# EAGLE board nutzen_03 (EAGLE 9.6.2), part 1 of 2
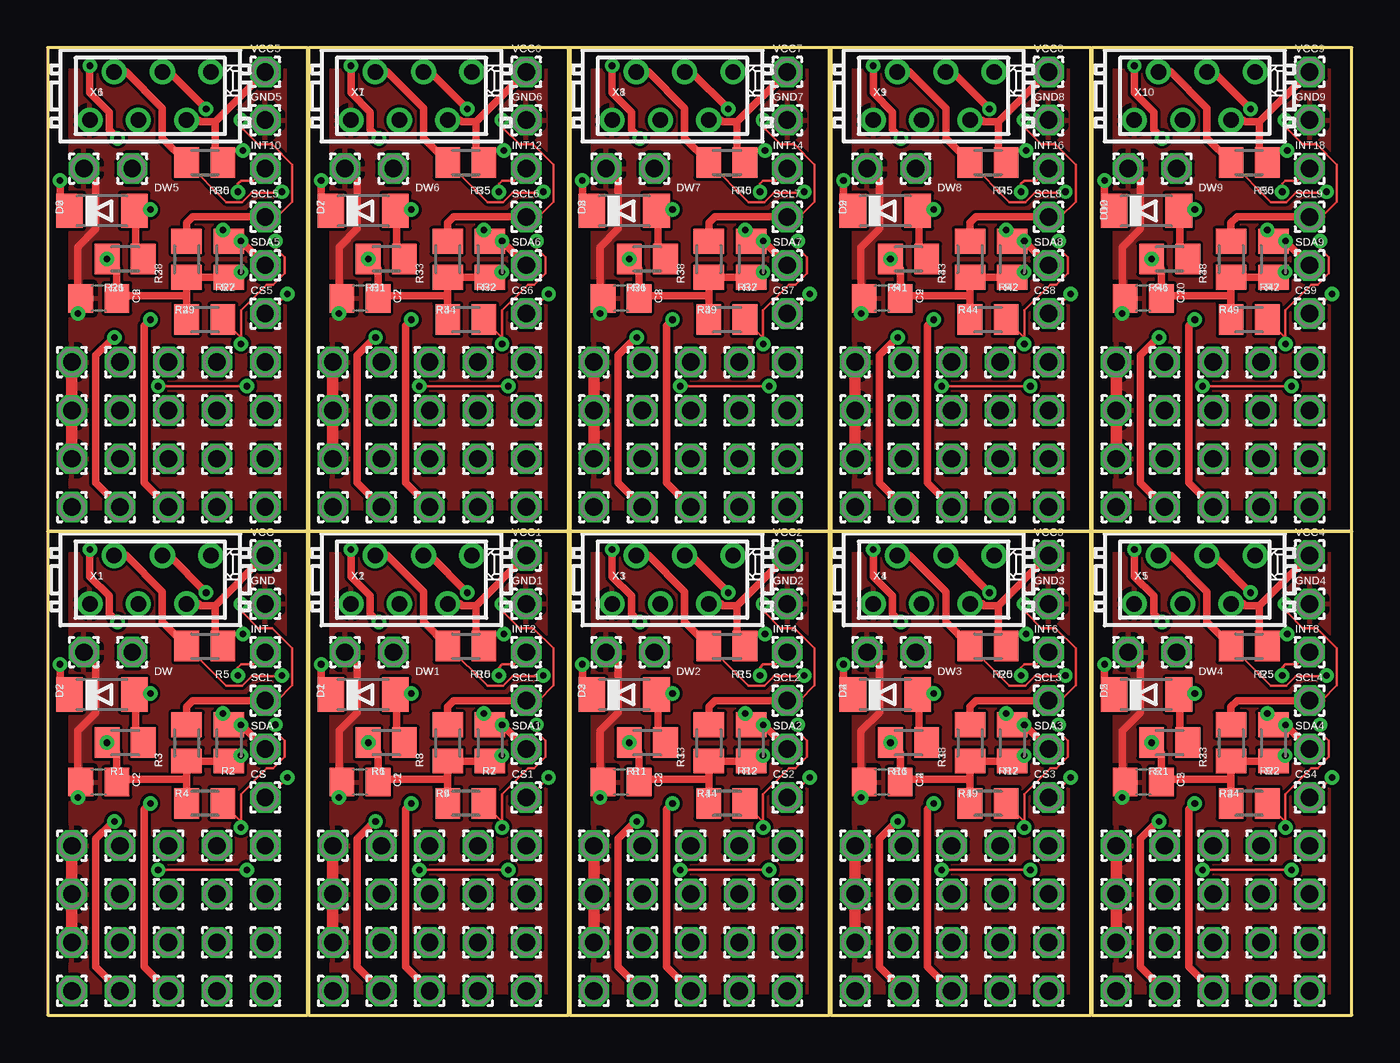
[diagram p0: board, top side]
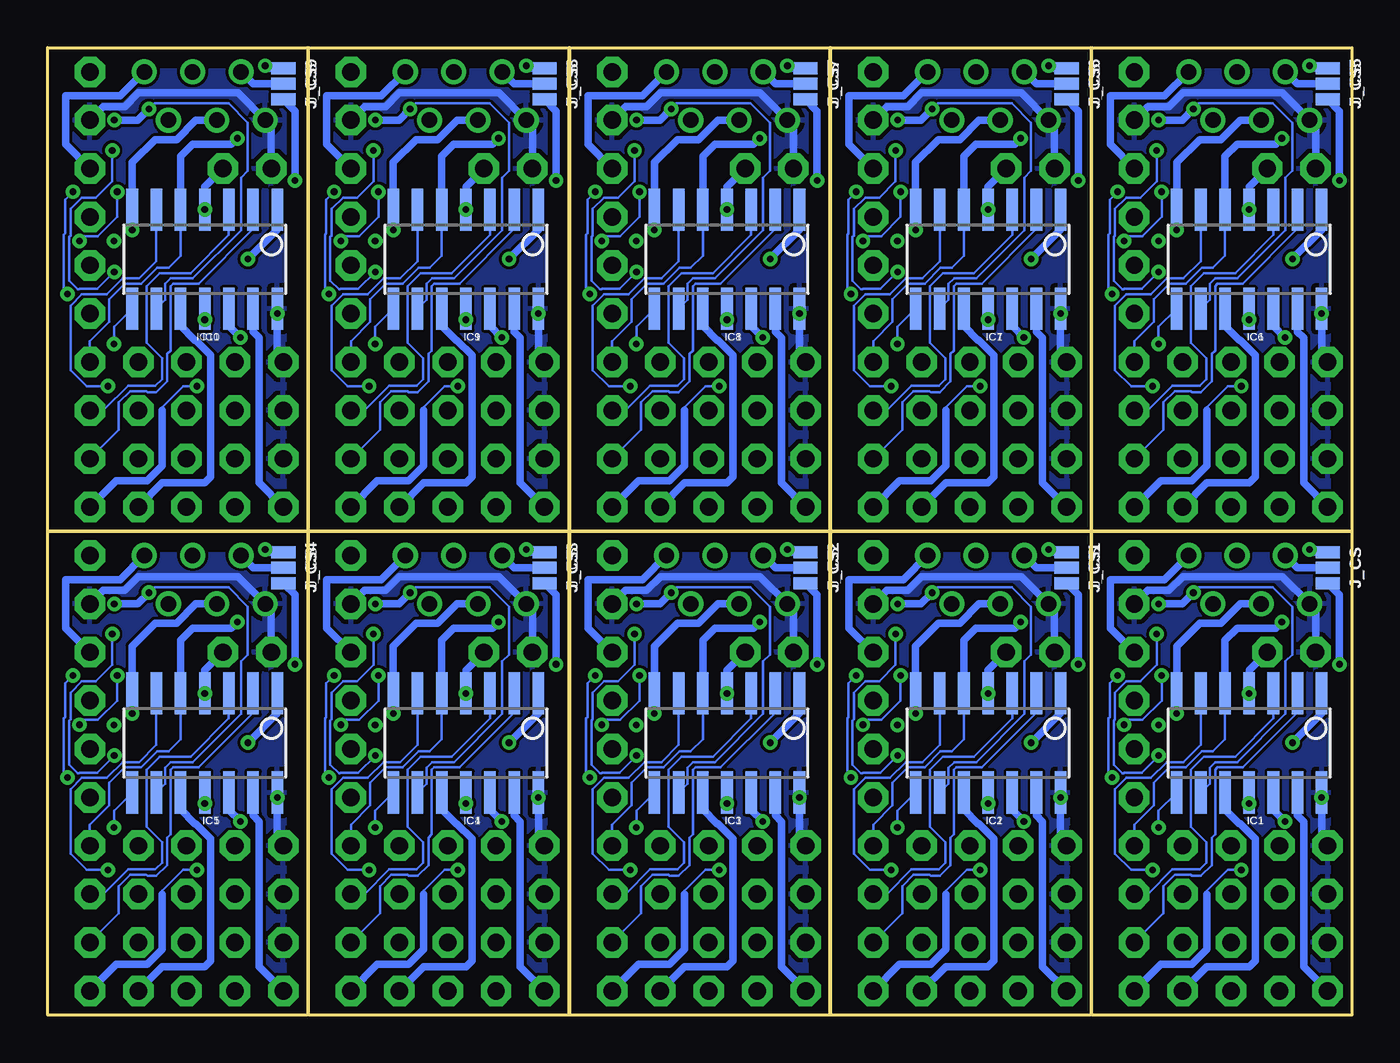
[diagram p1: board, bottom side, seen from below]

Size 68.52 x 50.8 mm. Coordinates in mm from the lower left corner, seen from the top.
Outline: 13.65,25.4 13.65,0 0,0 0,25.4
Outline: 13.65,25.4 0,25.4
Outline: 27.37,25.4 27.37,0 13.72,0 13.72,25.4
Outline: 27.37,25.4 13.72,25.4
Outline: 41.08,25.4 41.08,0 27.43,0 27.43,25.4
Outline: 41.08,25.4 27.43,25.4
Outline: 54.8,25.4 54.8,0 41.15,0 41.15,25.4
Outline: 54.8,25.4 41.15,25.4
Outline: 68.52,25.4 68.52,0 54.86,0 54.86,25.4
Outline: 68.52,25.4 54.86,25.4
Outline: 0,25.4 13.65,25.4
Outline: 13.65,25.4 13.65,50.8 0,50.8 0,25.4
Outline: 13.72,25.4 27.37,25.4
Outline: 27.37,25.4 27.37,50.8 13.72,50.8 13.72,25.4
Outline: 27.43,25.4 41.08,25.4
Outline: 41.08,25.4 41.08,50.8 27.43,50.8 27.43,25.4
Outline: 41.15,25.4 54.8,25.4
Outline: 54.8,25.4 54.8,50.8 41.15,50.8 41.15,25.4
Outline: 54.86,25.4 68.52,25.4
Outline: 68.52,25.4 68.52,50.8 54.86,50.8 54.86,25.4
Copper layers (1*16): Top 0.035mm / dielectric 1.5mm / Bottom 0.035mm
Design rules "default": minimum track width 6mil, minimum drill 0.35mm, track to track 6mil, track to pad 6mil, pad to pad 6mil, via to via 6mil, smd to smd 6mil, copper to edge 40mil, drill to drill 6mil, minimum pad ring 10mil, minimum via ring 8mil, stop-mask expansion 4mil, vias tented up to drill 0mil, thermal gap 10mil

## Footprints (pad centres in the part's own frame; a part is rotated, then mirrored left to right if it is on the bottom)
C0805 = smd 1.3 x 1.5: 1 -0.95,0; 2 0.95,0
1,6/0,9 = drill 0.914 pad 1.6 octagon: 1 0,0
MINIMELF = smd 1.4 x 1.8: A 1.7,0; C -1.7,0
SOIC14 = smd 0.61 x 2.21: 1 -3.81,-2.603; 2 -2.54,-2.603; 3 -1.27,-2.603; 4 0,-2.603; 5 1.27,-2.603; 6 2.54,-2.603; 7 3.81,-2.603; 8 3.81,2.603; 9 2.54,2.603; 10 1.27,2.603; 11 0,2.603; 12 -1.27,2.603; 13 -2.54,2.603; 14 -3.81,2.603
SMT-JUMPER_3_1-NC_PASTE_NO-SILK = smd 0.635 x 1.27: 1 -0.813,0; 2 0,0; 3 0.813,0
M0805 = smd 1.3 x 1.6: 1 -0.95,0; 2 0.95,0
MICROMATCH-6 = drill 0.813: 1 3.175,1.27; 2 1.905,-1.27; 3 0.635,1.27; 4 -0.635,-1.27; 5 -1.905,1.27; 6 -3.175,-1.27

## Placement (x,y rotation side)
C1  100n  [C0805]  16.41,12.23 180 top
C2  100n  [C0805]  2.69,12.23 180 top
C3  100n  [C0805]  30.12,12.23 180 top
C4  100n  [C0805]  43.84,12.23 180 top
C5  100n  [C0805]  57.56,12.23 180 top
C6  100n  [C0805]  2.69,37.63 180 top
C7  100n  [C0805]  16.41,37.63 180 top
C8  100n  [C0805]  30.12,37.63 180 top
C9  100n  [C0805]  43.84,37.63 180 top
C10  100n  [C0805]  57.56,37.63 180 top
CS  [1,6/0,9]  11.43,11.43 0 top
CS1  [1,6/0,9]  25.15,11.43 0 top
CS2  [1,6/0,9]  38.86,11.43 0 top
CS3  [1,6/0,9]  52.58,11.43 0 top
CS4  [1,6/0,9]  66.29,11.43 0 top
CS5  [1,6/0,9]  11.43,36.83 0 top
CS6  [1,6/0,9]  25.15,36.83 0 top
CS7  [1,6/0,9]  38.86,36.83 0 top
CS8  [1,6/0,9]  52.58,36.83 0 top
CS9  [1,6/0,9]  66.29,36.83 0 top
D1  [MINIMELF]  16.57,16.83 0 top
D2  [MINIMELF]  2.86,16.83 0 top
D3  [MINIMELF]  30.29,16.83 0 top
D4  [MINIMELF]  44.01,16.83 0 top
D5  [MINIMELF]  57.72,16.83 0 top
D6  [MINIMELF]  2.86,42.23 0 top
D7  [MINIMELF]  16.57,42.23 0 top
D8  [MINIMELF]  30.29,42.23 0 top
D9  [MINIMELF]  44.01,42.23 0 top
D10  [MINIMELF]  57.72,42.23 0 top
DW  [1,6/0,9]  4.45,19.05 0 top
DW1  [1,6/0,9]  18.16,19.05 0 top
DW2  [1,6/0,9]  31.88,19.05 0 top
DW3  [1,6/0,9]  45.59,19.05 0 top
DW4  [1,6/0,9]  59.31,19.05 0 top
DW5  [1,6/0,9]  4.45,44.45 0 top
DW6  [1,6/0,9]  18.16,44.45 0 top
DW7  [1,6/0,9]  31.88,44.45 0 top
DW8  [1,6/0,9]  45.59,44.45 0 top
DW9  [1,6/0,9]  59.31,44.45 0 top
GND  [1,6/0,9]  11.43,21.59 0 top
GND1  [1,6/0,9]  25.15,21.59 0 top
GND2  [1,6/0,9]  38.86,21.59 0 top
GND3  [1,6/0,9]  52.58,21.59 0 top
GND4  [1,6/0,9]  66.29,21.59 0 top
GND5  [1,6/0,9]  11.43,46.99 0 top
GND6  [1,6/0,9]  25.15,46.99 0 top
GND7  [1,6/0,9]  38.86,46.99 0 top
GND8  [1,6/0,9]  52.58,46.99 0 top
GND9  [1,6/0,9]  66.29,46.99 0 top
GND_  [1,6/0,9]  1.91,19.05 0 top
GND_1  [1,6/0,9]  15.62,19.05 0 top
GND_2  [1,6/0,9]  29.34,19.05 0 top
GND_3  [1,6/0,9]  43.05,19.05 0 top
GND_4  [1,6/0,9]  56.77,19.05 0 top
GND_5  [1,6/0,9]  1.91,44.45 0 top
GND_6  [1,6/0,9]  15.62,44.45 0 top
GND_7  [1,6/0,9]  29.34,44.45 0 top
GND_8  [1,6/0,9]  43.05,44.45 0 top
GND_9  [1,6/0,9]  56.77,44.45 0 top
IC1  TINY84 or TINY841  [SOIC14]  5.4,14.29 180 bottom
IC2  TINY84 or TINY841  [SOIC14]  19.11,14.29 180 bottom
IC3  TINY84 or TINY841  [SOIC14]  32.83,14.29 180 bottom
IC4  TINY84 or TINY841  [SOIC14]  46.55,14.29 180 bottom
IC5  TINY84 or TINY841  [SOIC14]  60.26,14.29 180 bottom
IC6  TINY84 or TINY841  [SOIC14]  5.4,39.69 180 bottom
IC7  TINY84 or TINY841  [SOIC14]  19.11,39.69 180 bottom
IC8  TINY84 or TINY841  [SOIC14]  32.83,39.69 180 bottom
IC9  TINY84 or TINY841  [SOIC14]  46.55,39.69 180 bottom
IC10  TINY84 or TINY841  [SOIC14]  60.26,39.69 180 bottom
INT  [1,6/0,9]  11.43,19.05 0 top
INT0  [1,6/0,9]  11.43,8.89 0 top
INT1  [1,6/0,9]  25.15,8.89 0 top
INT2  [1,6/0,9]  25.15,19.05 0 top
INT3  [1,6/0,9]  38.86,8.89 0 top
INT4  [1,6/0,9]  38.86,19.05 0 top
INT5  [1,6/0,9]  52.58,8.89 0 top
INT6  [1,6/0,9]  52.58,19.05 0 top
INT7  [1,6/0,9]  66.29,8.89 0 top
INT8  [1,6/0,9]  66.29,19.05 0 top
INT9  [1,6/0,9]  11.43,34.29 0 top
INT10  [1,6/0,9]  11.43,44.45 0 top
INT11  [1,6/0,9]  25.15,34.29 0 top
INT12  [1,6/0,9]  25.15,44.45 0 top
INT13  [1,6/0,9]  38.86,34.29 0 top
INT14  [1,6/0,9]  38.86,44.45 0 top
INT15  [1,6/0,9]  52.58,34.29 0 top
INT16  [1,6/0,9]  52.58,44.45 0 top
INT17  [1,6/0,9]  66.29,34.29 0 top
INT18  [1,6/0,9]  66.29,44.45 0 top
J_CS  [SMT-JUMPER_3_1-NC_PASTE_NO-SILK]  1.27,23.5 270 bottom
J_CS1  [SMT-JUMPER_3_1-NC_PASTE_NO-SILK]  14.99,23.5 270 bottom
J_CS2  [SMT-JUMPER_3_1-NC_PASTE_NO-SILK]  28.7,23.5 270 bottom
J_CS3  [SMT-JUMPER_3_1-NC_PASTE_NO-SILK]  42.42,23.5 270 bottom
J_CS4  [SMT-JUMPER_3_1-NC_PASTE_NO-SILK]  56.13,23.5 270 bottom
J_CS5  [SMT-JUMPER_3_1-NC_PASTE_NO-SILK]  1.27,48.9 270 bottom
J_CS6  [SMT-JUMPER_3_1-NC_PASTE_NO-SILK]  14.99,48.9 270 bottom
J_CS7  [SMT-JUMPER_3_1-NC_PASTE_NO-SILK]  28.7,48.9 270 bottom
J_CS8  [SMT-JUMPER_3_1-NC_PASTE_NO-SILK]  42.42,48.9 270 bottom
J_CS9  [SMT-JUMPER_3_1-NC_PASTE_NO-SILK]  56.13,48.9 270 bottom
PA0  [1,6/0,9]  1.27,1.27 0 top
PA1  [1,6/0,9]  3.81,1.27 0 top
PA2  [1,6/0,9]  6.35,1.27 0 top
PA3  [1,6/0,9]  8.89,1.27 0 top
PA4  [1,6/0,9]  14.99,1.27 0 top
PA5  [1,6/0,9]  17.53,1.27 0 top
PA6  [1,6/0,9]  20.07,1.27 0 top
PA7  [1,6/0,9]  11.43,1.27 0 top
PA8  [1,6/0,9]  22.61,1.27 0 top
PA9  [1,6/0,9]  25.15,1.27 0 top
PA10  [1,6/0,9]  28.7,1.27 0 top
PA11  [1,6/0,9]  31.24,1.27 0 top
PA12  [1,6/0,9]  33.78,1.27 0 top
PA13  [1,6/0,9]  36.32,1.27 0 top
PA14  [1,6/0,9]  38.86,1.27 0 top
PA15  [1,6/0,9]  42.42,1.27 0 top
PA16  [1,6/0,9]  44.96,1.27 0 top
PA17  [1,6/0,9]  47.5,1.27 0 top
PA18  [1,6/0,9]  50.04,1.27 0 top
PA19  [1,6/0,9]  52.58,1.27 0 top
PA20  [1,6/0,9]  56.13,1.27 0 top
PA21  [1,6/0,9]  58.67,1.27 0 top
PA22  [1,6/0,9]  61.21,1.27 0 top
PA23  [1,6/0,9]  63.75,1.27 0 top
PA24  [1,6/0,9]  66.29,1.27 0 top
PA25  [1,6/0,9]  1.27,26.67 0 top
PA26  [1,6/0,9]  3.81,26.67 0 top
PA27  [1,6/0,9]  6.35,26.67 0 top
PA28  [1,6/0,9]  8.89,26.67 0 top
PA29  [1,6/0,9]  11.43,26.67 0 top
PA30  [1,6/0,9]  14.99,26.67 0 top
PA31  [1,6/0,9]  17.53,26.67 0 top
PA32  [1,6/0,9]  20.07,26.67 0 top
PA33  [1,6/0,9]  22.61,26.67 0 top
PA34  [1,6/0,9]  25.15,26.67 0 top
PA35  [1,6/0,9]  28.7,26.67 0 top
PA36  [1,6/0,9]  31.24,26.67 0 top
PA37  [1,6/0,9]  33.78,26.67 0 top
PA38  [1,6/0,9]  36.32,26.67 0 top
PA39  [1,6/0,9]  38.86,26.67 0 top
PA40  [1,6/0,9]  42.42,26.67 0 top
PA41  [1,6/0,9]  44.96,26.67 0 top
PA42  [1,6/0,9]  47.5,26.67 0 top
PA43  [1,6/0,9]  50.04,26.67 0 top
PA44  [1,6/0,9]  52.58,26.67 0 top
PA45  [1,6/0,9]  56.13,26.67 0 top
PA46  [1,6/0,9]  58.67,26.67 0 top
PA47  [1,6/0,9]  61.21,26.67 0 top
PA48  [1,6/0,9]  63.75,26.67 0 top
PA49  [1,6/0,9]  66.29,26.67 0 top
PAD1  [1,6/0,9]  22.61,6.35 0 top
PAD2  [1,6/0,9]  20.07,6.35 0 top
PAD3  [1,6/0,9]  20.07,3.81 0 top
PAD4  [1,6/0,9]  20.07,8.89 0 top
PAD5  [1,6/0,9]  17.53,6.35 0 top
PAD6  [1,6/0,9]  17.53,3.81 0 top
PAD7  [1,6/0,9]  22.61,8.89 0 top
PAD8  [1,6/0,9]  22.61,3.81 0 top
PAD9  [1,6/0,9]  17.53,8.89 0 top
PAD10  [1,6/0,9]  14.99,8.89 0 top
PAD11  [1,6/0,9]  14.99,6.35 0 top
PAD12  [1,6/0,9]  14.99,3.81 0 top
PAD13  [1,6/0,9]  36.32,6.35 0 top
PAD14  [1,6/0,9]  33.78,6.35 0 top
PAD15  [1,6/0,9]  33.78,3.81 0 top
PAD16  [1,6/0,9]  33.78,8.89 0 top
PAD17  [1,6/0,9]  31.24,6.35 0 top
PAD18  [1,6/0,9]  31.24,3.81 0 top
PAD19  [1,6/0,9]  36.32,8.89 0 top
PAD20  [1,6/0,9]  36.32,3.81 0 top
PAD21  [1,6/0,9]  31.24,8.89 0 top
PAD22  [1,6/0,9]  28.7,8.89 0 top
PAD23  [1,6/0,9]  28.7,6.35 0 top
PAD24  [1,6/0,9]  28.7,3.81 0 top
PAD25  [1,6/0,9]  50.04,6.35 0 top
PAD26  [1,6/0,9]  47.5,6.35 0 top
PAD27  [1,6/0,9]  47.5,3.81 0 top
PAD28  [1,6/0,9]  47.5,8.89 0 top
PAD29  [1,6/0,9]  44.96,6.35 0 top
PAD30  [1,6/0,9]  44.96,3.81 0 top
PAD31  [1,6/0,9]  50.04,8.89 0 top
PAD32  [1,6/0,9]  50.04,3.81 0 top
PAD33  [1,6/0,9]  44.96,8.89 0 top
PAD34  [1,6/0,9]  42.42,8.89 0 top
PAD35  [1,6/0,9]  42.42,6.35 0 top
PAD36  [1,6/0,9]  42.42,3.81 0 top
PAD37  [1,6/0,9]  63.75,6.35 0 top
PAD38  [1,6/0,9]  61.21,6.35 0 top
PAD39  [1,6/0,9]  61.21,3.81 0 top
PAD40  [1,6/0,9]  61.21,8.89 0 top
PAD41  [1,6/0,9]  58.67,6.35 0 top
PAD42  [1,6/0,9]  58.67,3.81 0 top
PAD43  [1,6/0,9]  63.75,8.89 0 top
PAD44  [1,6/0,9]  63.75,3.81 0 top
PAD45  [1,6/0,9]  58.67,8.89 0 top
PAD46  [1,6/0,9]  56.13,8.89 0 top
PAD47  [1,6/0,9]  56.13,6.35 0 top
PAD48  [1,6/0,9]  56.13,3.81 0 top
PAD49  [1,6/0,9]  8.89,31.75 0 top
PAD50  [1,6/0,9]  6.35,31.75 0 top
PAD51  [1,6/0,9]  6.35,29.21 0 top
PAD52  [1,6/0,9]  6.35,34.29 0 top
PAD53  [1,6/0,9]  3.81,31.75 0 top
PAD54  [1,6/0,9]  3.81,29.21 0 top
PAD55  [1,6/0,9]  8.89,34.29 0 top
PAD56  [1,6/0,9]  8.89,29.21 0 top
PAD57  [1,6/0,9]  3.81,34.29 0 top
PAD58  [1,6/0,9]  1.27,34.29 0 top
PAD59  [1,6/0,9]  1.27,31.75 0 top
PAD60  [1,6/0,9]  1.27,29.21 0 top
PAD61  [1,6/0,9]  22.61,31.75 0 top
PAD62  [1,6/0,9]  20.07,31.75 0 top
PAD63  [1,6/0,9]  20.07,29.21 0 top
PAD64  [1,6/0,9]  20.07,34.29 0 top
PAD65  [1,6/0,9]  17.53,31.75 0 top
PAD66  [1,6/0,9]  17.53,29.21 0 top
PAD67  [1,6/0,9]  22.61,34.29 0 top
PAD68  [1,6/0,9]  22.61,29.21 0 top
PAD69  [1,6/0,9]  17.53,34.29 0 top
PAD70  [1,6/0,9]  14.99,34.29 0 top
PAD71  [1,6/0,9]  14.99,31.75 0 top
PAD72  [1,6/0,9]  14.99,29.21 0 top
PAD73  [1,6/0,9]  36.32,31.75 0 top
PAD74  [1,6/0,9]  33.78,31.75 0 top
PAD75  [1,6/0,9]  33.78,29.21 0 top
PAD76  [1,6/0,9]  33.78,34.29 0 top
PAD77  [1,6/0,9]  31.24,31.75 0 top
PAD78  [1,6/0,9]  31.24,29.21 0 top
PAD79  [1,6/0,9]  36.32,34.29 0 top
PAD80  [1,6/0,9]  36.32,29.21 0 top
PAD81  [1,6/0,9]  31.24,34.29 0 top
PAD82  [1,6/0,9]  28.7,34.29 0 top
PAD83  [1,6/0,9]  28.7,31.75 0 top
PAD84  [1,6/0,9]  28.7,29.21 0 top
PAD85  [1,6/0,9]  50.04,31.75 0 top
PAD86  [1,6/0,9]  47.5,31.75 0 top
PAD87  [1,6/0,9]  47.5,29.21 0 top
PAD88  [1,6/0,9]  47.5,34.29 0 top
PAD89  [1,6/0,9]  8.89,6.35 0 top
PAD90  [1,6/0,9]  6.35,6.35 0 top
PAD91  [1,6/0,9]  6.35,3.81 0 top
PAD92  [1,6/0,9]  44.96,31.75 0 top
PAD93  [1,6/0,9]  44.96,29.21 0 top
PAD94  [1,6/0,9]  6.35,8.89 0 top
PAD95  [1,6/0,9]  3.81,6.35 0 top
PAD96  [1,6/0,9]  3.81,3.81 0 top
PAD97  [1,6/0,9]  8.89,8.89 0 top
PAD98  [1,6/0,9]  8.89,3.81 0 top
PAD99  [1,6/0,9]  3.81,8.89 0 top
PAD100  [1,6/0,9]  1.27,8.89 0 top
PAD101  [1,6/0,9]  1.27,6.35 0 top
PAD102  [1,6/0,9]  1.27,3.81 0 top
PAD103  [1,6/0,9]  50.04,34.29 0 top
PAD104  [1,6/0,9]  50.04,29.21 0 top
PAD105  [1,6/0,9]  44.96,34.29 0 top
PAD106  [1,6/0,9]  42.42,34.29 0 top
PAD107  [1,6/0,9]  42.42,31.75 0 top
PAD108  [1,6/0,9]  42.42,29.21 0 top
PAD109  [1,6/0,9]  63.75,31.75 0 top
PAD110  [1,6/0,9]  61.21,31.75 0 top
PAD111  [1,6/0,9]  61.21,29.21 0 top
PAD112  [1,6/0,9]  61.21,34.29 0 top
PAD113  [1,6/0,9]  58.67,31.75 0 top
PAD114  [1,6/0,9]  58.67,29.21 0 top
PAD115  [1,6/0,9]  63.75,34.29 0 top
PAD116  [1,6/0,9]  63.75,29.21 0 top
PAD117  [1,6/0,9]  58.67,34.29 0 top
PAD118  [1,6/0,9]  56.13,34.29 0 top
PAD119  [1,6/0,9]  56.13,31.75 0 top
PAD120  [1,6/0,9]  56.13,29.21 0 top
PB0  [1,6/0,9]  11.43,3.81 0 top
PB1  [1,6/0,9]  11.43,6.35 0 top
PB2  [1,6/0,9]  25.15,3.81 0 top
PB3  [1,6/0,9]  25.15,6.35 0 top
PB4  [1,6/0,9]  38.86,3.81 0 top
PB5  [1,6/0,9]  38.86,6.35 0 top
PB6  [1,6/0,9]  52.58,3.81 0 top
PB7  [1,6/0,9]  52.58,6.35 0 top
PB8  [1,6/0,9]  66.29,3.81 0 top
PB9  [1,6/0,9]  66.29,6.35 0 top
PB10  [1,6/0,9]  11.43,29.21 0 top
PB11  [1,6/0,9]  11.43,31.75 0 top
PB12  [1,6/0,9]  25.15,29.21 0 top
PB13  [1,6/0,9]  25.15,31.75 0 top
PB14  [1,6/0,9]  38.86,29.21 0 top
PB15  [1,6/0,9]  38.86,31.75 0 top
PB16  [1,6/0,9]  52.58,29.21 0 top
PB17  [1,6/0,9]  52.58,31.75 0 top
PB18  [1,6/0,9]  66.29,29.21 0 top
PB19  [1,6/0,9]  66.29,31.75 0 top
R1  10k  [M0805]  4.08,14.3 0 top
R2  10k  [M0805]  9.53,14.29 90 top
R3  10k  [M0805]  7.3,14.29 90 top
R4  10k  [M0805]  8.26,11.11 0 top
R5  10k  [M0805]  8.26,19.37 180 top
R6  10k  [M0805]  17.79,14.3 0 top
R7  10k  [M0805]  23.24,14.29 90 top
R8  10k  [M0805]  21.02,14.29 90 top
R9  10k  [M0805]  21.97,11.11 0 top
R10  10k  [M0805]  21.97,19.37 180 top
R11  10k  [M0805]  31.51,14.3 0 top
R12  10k  [M0805]  36.96,14.29 90 top
R13  10k  [M0805]  34.73,14.29 90 top
R14  10k  [M0805]  35.69,11.11 0 top
R15  10k  [M0805]  35.69,19.37 180 top
R16  10k  [M0805]  45.22,14.3 0 top
R17  10k  [M0805]  50.67,14.29 90 top
R18  10k  [M0805]  48.45,14.29 90 top
R19  10k  [M0805]  49.4,11.11 0 top
R20  10k  [M0805]  49.4,19.37 180 top
R21  10k  [M0805]  58.94,14.3 0 top
R22  10k  [M0805]  64.39,14.29 90 top
R23  10k  [M0805]  62.17,14.29 90 top
R24  10k  [M0805]  63.12,11.11 0 top
R25  10k  [M0805]  63.12,19.37 180 top
R26  10k  [M0805]  4.08,39.7 0 top
R27  10k  [M0805]  9.53,39.69 90 top
R28  10k  [M0805]  7.3,39.69 90 top
R29  10k  [M0805]  8.26,36.51 0 top
R30  10k  [M0805]  8.26,44.77 180 top
R31  10k  [M0805]  17.79,39.7 0 top
R32  10k  [M0805]  23.24,39.69 90 top
R33  10k  [M0805]  21.02,39.69 90 top
R34  10k  [M0805]  21.97,36.51 0 top
R35  10k  [M0805]  21.97,44.77 180 top
R36  10k  [M0805]  31.51,39.7 0 top
R37  10k  [M0805]  36.96,39.69 90 top
R38  10k  [M0805]  34.73,39.69 90 top
R39  10k  [M0805]  35.69,36.51 0 top
R40  10k  [M0805]  35.69,44.77 180 top
R41  10k  [M0805]  45.22,39.7 0 top
R42  10k  [M0805]  50.67,39.69 90 top
R43  10k  [M0805]  48.45,39.69 90 top
R44  10k  [M0805]  49.4,36.51 0 top
R45  10k  [M0805]  49.4,44.77 180 top
R46  10k  [M0805]  58.94,39.7 0 top
R47  10k  [M0805]  64.39,39.69 90 top
R48  10k  [M0805]  62.17,39.69 90 top
R49  10k  [M0805]  63.12,36.51 0 top
R50  10k  [M0805]  63.12,44.77 180 top
SCL  [1,6/0,9]  11.43,16.51 0 top
SCL1  [1,6/0,9]  25.15,16.51 0 top
SCL2  [1,6/0,9]  38.86,16.51 0 top
SCL3  [1,6/0,9]  52.58,16.51 0 top
SCL4  [1,6/0,9]  66.29,16.51 0 top
SCL5  [1,6/0,9]  11.43,41.91 0 top
SCL6  [1,6/0,9]  25.15,41.91 0 top
SCL7  [1,6/0,9]  38.86,41.91 0 top
SCL8  [1,6/0,9]  52.58,41.91 0 top
SCL9  [1,6/0,9]  66.29,41.91 0 top
SDA  [1,6/0,9]  11.43,13.97 0 top
SDA1  [1,6/0,9]  25.15,13.97 0 top
SDA2  [1,6/0,9]  38.86,13.97 0 top
SDA3  [1,6/0,9]  52.58,13.97 0 top
SDA4  [1,6/0,9]  66.29,13.97 0 top
SDA5  [1,6/0,9]  11.43,39.37 0 top
SDA6  [1,6/0,9]  25.15,39.37 0 top
SDA7  [1,6/0,9]  38.86,39.37 0 top
SDA8  [1,6/0,9]  52.58,39.37 0 top
SDA9  [1,6/0,9]  66.29,39.37 0 top
VCC  [1,6/0,9]  11.43,24.13 0 top
VCC1  [1,6/0,9]  25.15,24.13 0 top
VCC2  [1,6/0,9]  38.86,24.13 0 top
VCC3  [1,6/0,9]  52.58,24.13 0 top
VCC4  [1,6/0,9]  66.29,24.13 0 top
VCC5  [1,6/0,9]  11.43,49.53 0 top
VCC6  [1,6/0,9]  25.15,49.53 0 top
VCC7  [1,6/0,9]  38.86,49.53 0 top
VCC8  [1,6/0,9]  52.58,49.53 0 top
VCC9  [1,6/0,9]  66.29,49.53 0 top
X1  BUS  [MICROMATCH-6]  5.4,22.86 0 top
X2  BUS  [MICROMATCH-6]  19.11,22.86 0 top
X3  BUS  [MICROMATCH-6]  32.83,22.86 0 top
X4  BUS  [MICROMATCH-6]  46.55,22.86 0 top
X5  BUS  [MICROMATCH-6]  60.26,22.86 0 top
X6  BUS  [MICROMATCH-6]  5.4,48.26 0 top
X7  BUS  [MICROMATCH-6]  19.11,48.26 0 top
X8  BUS  [MICROMATCH-6]  32.83,48.26 0 top
X9  BUS  [MICROMATCH-6]  46.55,48.26 0 top
X10  BUS  [MICROMATCH-6]  60.26,48.26 0 top

## Library data of the parts
C1-C10 = rcl
CS CS1-CS9 DW DW1-DW9 GND GND1-GND9 GND_ GND_1-GND_9 INT INT0 INT1-INT18 PA0 PA1-PA49 PAD1-PAD120 PB0 PB1-PB19 SCL SCL1-SCL9 SDA SDA1-SDA9 VCC VCC1-VCC9 = wirepad
D1-D10 = diode
IC1-IC10 = avr-7
J_CS J_CS1-J_CS9 = SparkFun-Jumpers
R1-R50 = rcl; SPICEPREFIX: R
X1-X10 = con-amp-micromatch; MPN: 7-215464-6; OC_FARNELL: 3784630; OC_NEWARK: 19R8125

## Nets
BUS_INT: IC1.8 INT.1 R4.2 X1.1
BUS_INT1: IC2.8 INT2.1 R9.2 X2.1
BUS_INT2: IC3.8 INT4.1 R14.2 X3.1
BUS_INT3: IC4.8 INT6.1 R19.2 X4.1
BUS_INT4: IC5.8 INT8.1 R24.2 X5.1
BUS_INT5: IC6.8 INT10.1 R29.2 X6.1
BUS_INT6: IC7.8 INT12.1 R34.2 X7.1
BUS_INT7: IC8.8 INT14.1 R39.2 X8.1
BUS_INT8: IC9.8 INT16.1 R44.2 X9.1
BUS_INT9: IC10.8 INT18.1 R49.2 X10.1
BUS_P1: CS1.1 J_CS1.2 R10.2 X2.5
BUS_P2: CS2.1 J_CS2.2 R15.2 X3.5
BUS_P3: CS3.1 J_CS3.2 R20.2 X4.5
BUS_P4: CS4.1 J_CS4.2 R25.2 X5.5
BUS_P5: CS.1 J_CS.2 R5.2 X1.5
BUS_P6: CS5.1 J_CS5.2 R30.2 X6.5
BUS_P7: CS6.1 J_CS6.2 R35.2 X7.5
BUS_P8: CS7.1 J_CS7.2 R40.2 X8.5
BUS_P9: CS8.1 J_CS8.2 R45.2 X9.5
BUS_P10: CS9.1 J_CS9.2 R50.2 X10.5
BUS_RESET: D2.C J_CS.3
BUS_RESET1: D1.C J_CS1.3
BUS_RESET2: D3.C J_CS2.3
BUS_RESET3: D4.C J_CS3.3
BUS_RESET4: D5.C J_CS4.3
BUS_RESET5: D6.C J_CS5.3
BUS_RESET6: D7.C J_CS6.3
BUS_RESET7: D8.C J_CS7.3
BUS_RESET8: D9.C J_CS8.3
BUS_RESET9: D10.C J_CS9.3
BUS_SCL: IC1.9 R3.2 SCL.1 X1.3
BUS_SCL1: IC2.9 R8.2 SCL1.1 X2.3
BUS_SCL2: IC3.9 R13.2 SCL2.1 X3.3
BUS_SCL3: IC4.9 R18.2 SCL3.1 X4.3
BUS_SCL4: IC5.9 R23.2 SCL4.1 X5.3
BUS_SCL5: IC6.9 R28.2 SCL5.1 X6.3
BUS_SCL6: IC7.9 R33.2 SCL6.1 X7.3
BUS_SCL7: IC8.9 R38.2 SCL7.1 X8.3
BUS_SCL8: IC9.9 R43.2 SCL8.1 X9.3
BUS_SCL9: IC10.9 R48.2 SCL9.1 X10.3
BUS_SDA: IC1.7 R2.2 SDA.1 X1.4
BUS_SDA1: IC2.7 R7.2 SDA1.1 X2.4
BUS_SDA2: IC3.7 R12.2 SDA2.1 X3.4
BUS_SDA3: IC4.7 R17.2 SDA3.1 X4.4
BUS_SDA4: IC5.7 R22.2 SDA4.1 X5.4
BUS_SDA5: IC6.7 R27.2 SDA5.1 X6.4
BUS_SDA6: IC7.7 R32.2 SDA6.1 X7.4
BUS_SDA7: IC8.7 R37.2 SDA7.1 X8.4
BUS_SDA8: IC9.7 R42.2 SDA8.1 X9.4
BUS_SDA9: IC10.7 R47.2 SDA9.1 X10.4
DW: D2.A DW.1 IC1.4 R1.2
DW1: D1.A DW1.1 IC2.4 R6.2
DW2: D3.A DW2.1 IC3.4 R11.2
DW3: D4.A DW3.1 IC4.4 R16.2
DW4: D5.A DW4.1 IC5.4 R21.2
DW5: D6.A DW5.1 IC6.4 R26.2
DW6: D7.A DW6.1 IC7.4 R31.2
DW7: D8.A DW7.1 IC8.4 R36.2
DW8: D9.A DW8.1 IC9.4 R41.2
DW9: D10.A DW9.1 IC10.4 R46.2
GND: C2.2 GND.1 GND_.1 IC1.14 PAD100.1 PAD101.1 PAD102.1 X1.6
GND1: C1.2 GND1.1 GND_1.1 IC2.14 PAD10.1 PAD11.1 PAD12.1 X2.6
GND2: C3.2 GND2.1 GND_2.1 IC3.14 PAD22.1 PAD23.1 PAD24.1 X3.6
GND3: C4.2 GND3.1 GND_3.1 IC4.14 PAD34.1 PAD35.1 PAD36.1 X4.6
GND4: C5.2 GND4.1 GND_4.1 IC5.14 PAD46.1 PAD47.1 PAD48.1 X5.6
GND5: C6.2 GND5.1 GND_5.1 IC6.14 PAD58.1 PAD59.1 PAD60.1 X6.6
GND6: C7.2 GND6.1 GND_6.1 IC7.14 PAD70.1 PAD71.1 PAD72.1 X7.6
GND7: C8.2 GND7.1 GND_7.1 IC8.14 PAD82.1 PAD83.1 PAD84.1 X8.6
GND8: C9.2 GND8.1 GND_8.1 IC9.14 PAD106.1 PAD107.1 PAD108.1 X9.6
GND9: C10.2 GND9.1 GND_9.1 IC10.14 PAD118.1 PAD119.1 PAD120.1 X10.6
INT0: IC1.5 INT0.1 J_CS.1
INT1: IC2.5 INT1.1 J_CS1.1
INT2: IC3.5 INT3.1 J_CS2.1
INT3: IC4.5 INT5.1 J_CS3.1
INT4: IC5.5 INT7.1 J_CS4.1
INT5: IC6.5 INT9.1 J_CS5.1
INT6: IC7.5 INT11.1 J_CS6.1
INT7: IC8.5 INT13.1 J_CS7.1
INT8: IC9.5 INT15.1 J_CS8.1
INT9: IC10.5 INT17.1 J_CS9.1
PA0: IC1.13 PA0.1
PA1: IC1.12 PA1.1
PA2: IC1.11 PA2.1
PA3: IC1.10 PA3.1
PA4: IC2.13 PA4.1
PA5: IC2.6 PA9.1
PA6: IC2.10 PA8.1
PA7: IC1.6 PA7.1
PA8: IC2.11 PA6.1
PA9: IC2.12 PA5.1
PA10: IC3.13 PA10.1
PA11: IC3.6 PA14.1
PA12: IC3.10 PA13.1
PA13: IC3.11 PA12.1
PA14: IC3.12 PA11.1
PA15: IC4.13 PA15.1
PA16: IC4.6 PA19.1
PA17: IC4.10 PA18.1
PA18: IC4.11 PA17.1
PA19: IC4.12 PA16.1
PA20: IC5.13 PA20.1
PA21: IC5.6 PA24.1
PA22: IC5.10 PA23.1
PA23: IC5.11 PA22.1
PA24: IC5.12 PA21.1
PA25: IC6.13 PA25.1
PA26: IC6.6 PA29.1
PA27: IC6.10 PA28.1
PA28: IC6.11 PA27.1
PA29: IC6.12 PA26.1
PA30: IC7.13 PA30.1
PA31: IC7.6 PA34.1
PA32: IC7.10 PA33.1
PA33: IC7.11 PA32.1
PA34: IC7.12 PA31.1
PA35: IC8.13 PA35.1
PA36: IC8.6 PA39.1
PA37: IC8.10 PA38.1
PA38: IC8.11 PA37.1
PA39: IC8.12 PA36.1
PA40: IC9.13 PA40.1
PA41: IC9.6 PA44.1
PA42: IC9.10 PA43.1
PA43: IC9.11 PA42.1
PA44: IC9.12 PA41.1
PA45: IC10.13 PA45.1
PA46: IC10.6 PA49.1
PA47: IC10.10 PA48.1
PA48: IC10.11 PA47.1
PA49: IC10.12 PA46.1
PB0: IC1.2 PB0.1
PB1: IC1.3 PB1.1
PB2: IC2.3 PB3.1
PB3: IC2.2 PB2.1
PB4: IC3.3 PB5.1
PB5: IC3.2 PB4.1
PB6: IC4.3 PB7.1
PB7: IC4.2 PB6.1
PB8: IC5.3 PB9.1
PB9: IC5.2 PB8.1
PB10: IC6.3 PB11.1
PB11: IC6.2 PB10.1
PB12: IC7.3 PB13.1
PB13: IC7.2 PB12.1
PB14: IC8.3 PB15.1
PB15: IC8.2 PB14.1
PB16: IC9.3 PB17.1
PB17: IC9.2 PB16.1
PB18: IC10.3 PB19.1
PB19: IC10.2 PB18.1
VCC: C2.1 IC1.1 R1.1 R2.1 R3.1 R4.1 R5.1 VCC.1 X1.2
VCC1: C1.1 IC2.1 R6.1 R7.1 R8.1 R9.1 R10.1 VCC1.1 X2.2
VCC2: C3.1 IC3.1 R11.1 R12.1 R13.1 R14.1 R15.1 VCC2.1 X3.2
VCC3: C4.1 IC4.1 R16.1 R17.1 R18.1 R19.1 R20.1 VCC3.1 X4.2
VCC4: C5.1 IC5.1 R21.1 R22.1 R23.1 R24.1 R25.1 VCC4.1 X5.2
VCC5: C6.1 IC6.1 R26.1 R27.1 R28.1 R29.1 R30.1 VCC5.1 X6.2
VCC6: C7.1 IC7.1 R31.1 R32.1 R33.1 R34.1 R35.1 VCC6.1 X7.2
VCC7: C8.1 IC8.1 R36.1 R37.1 R38.1 R39.1 R40.1 VCC7.1 X8.2
VCC8: C9.1 IC9.1 R41.1 R42.1 R43.1 R44.1 R45.1 VCC8.1 X9.2
VCC9: C10.1 IC10.1 R46.1 R47.1 R48.1 R49.1 R50.1 VCC9.1 X10.2